# Altium PCB PCB1.PcbDoc (part 3 of 12)
Units mm, origin at the board's own origin, x right, y up, seen from the top; angles counter-clockwise.
Board outline 100 x 100 mm, 6 copper layers (Top Layer, Int1 (GND), Int2 (Sign), Int3 (Sign), Int4 (PWR), Bottom Layer), stack 1.538 mm thick; 614 components, 712 nets, 3014 pads, 1096 vias.
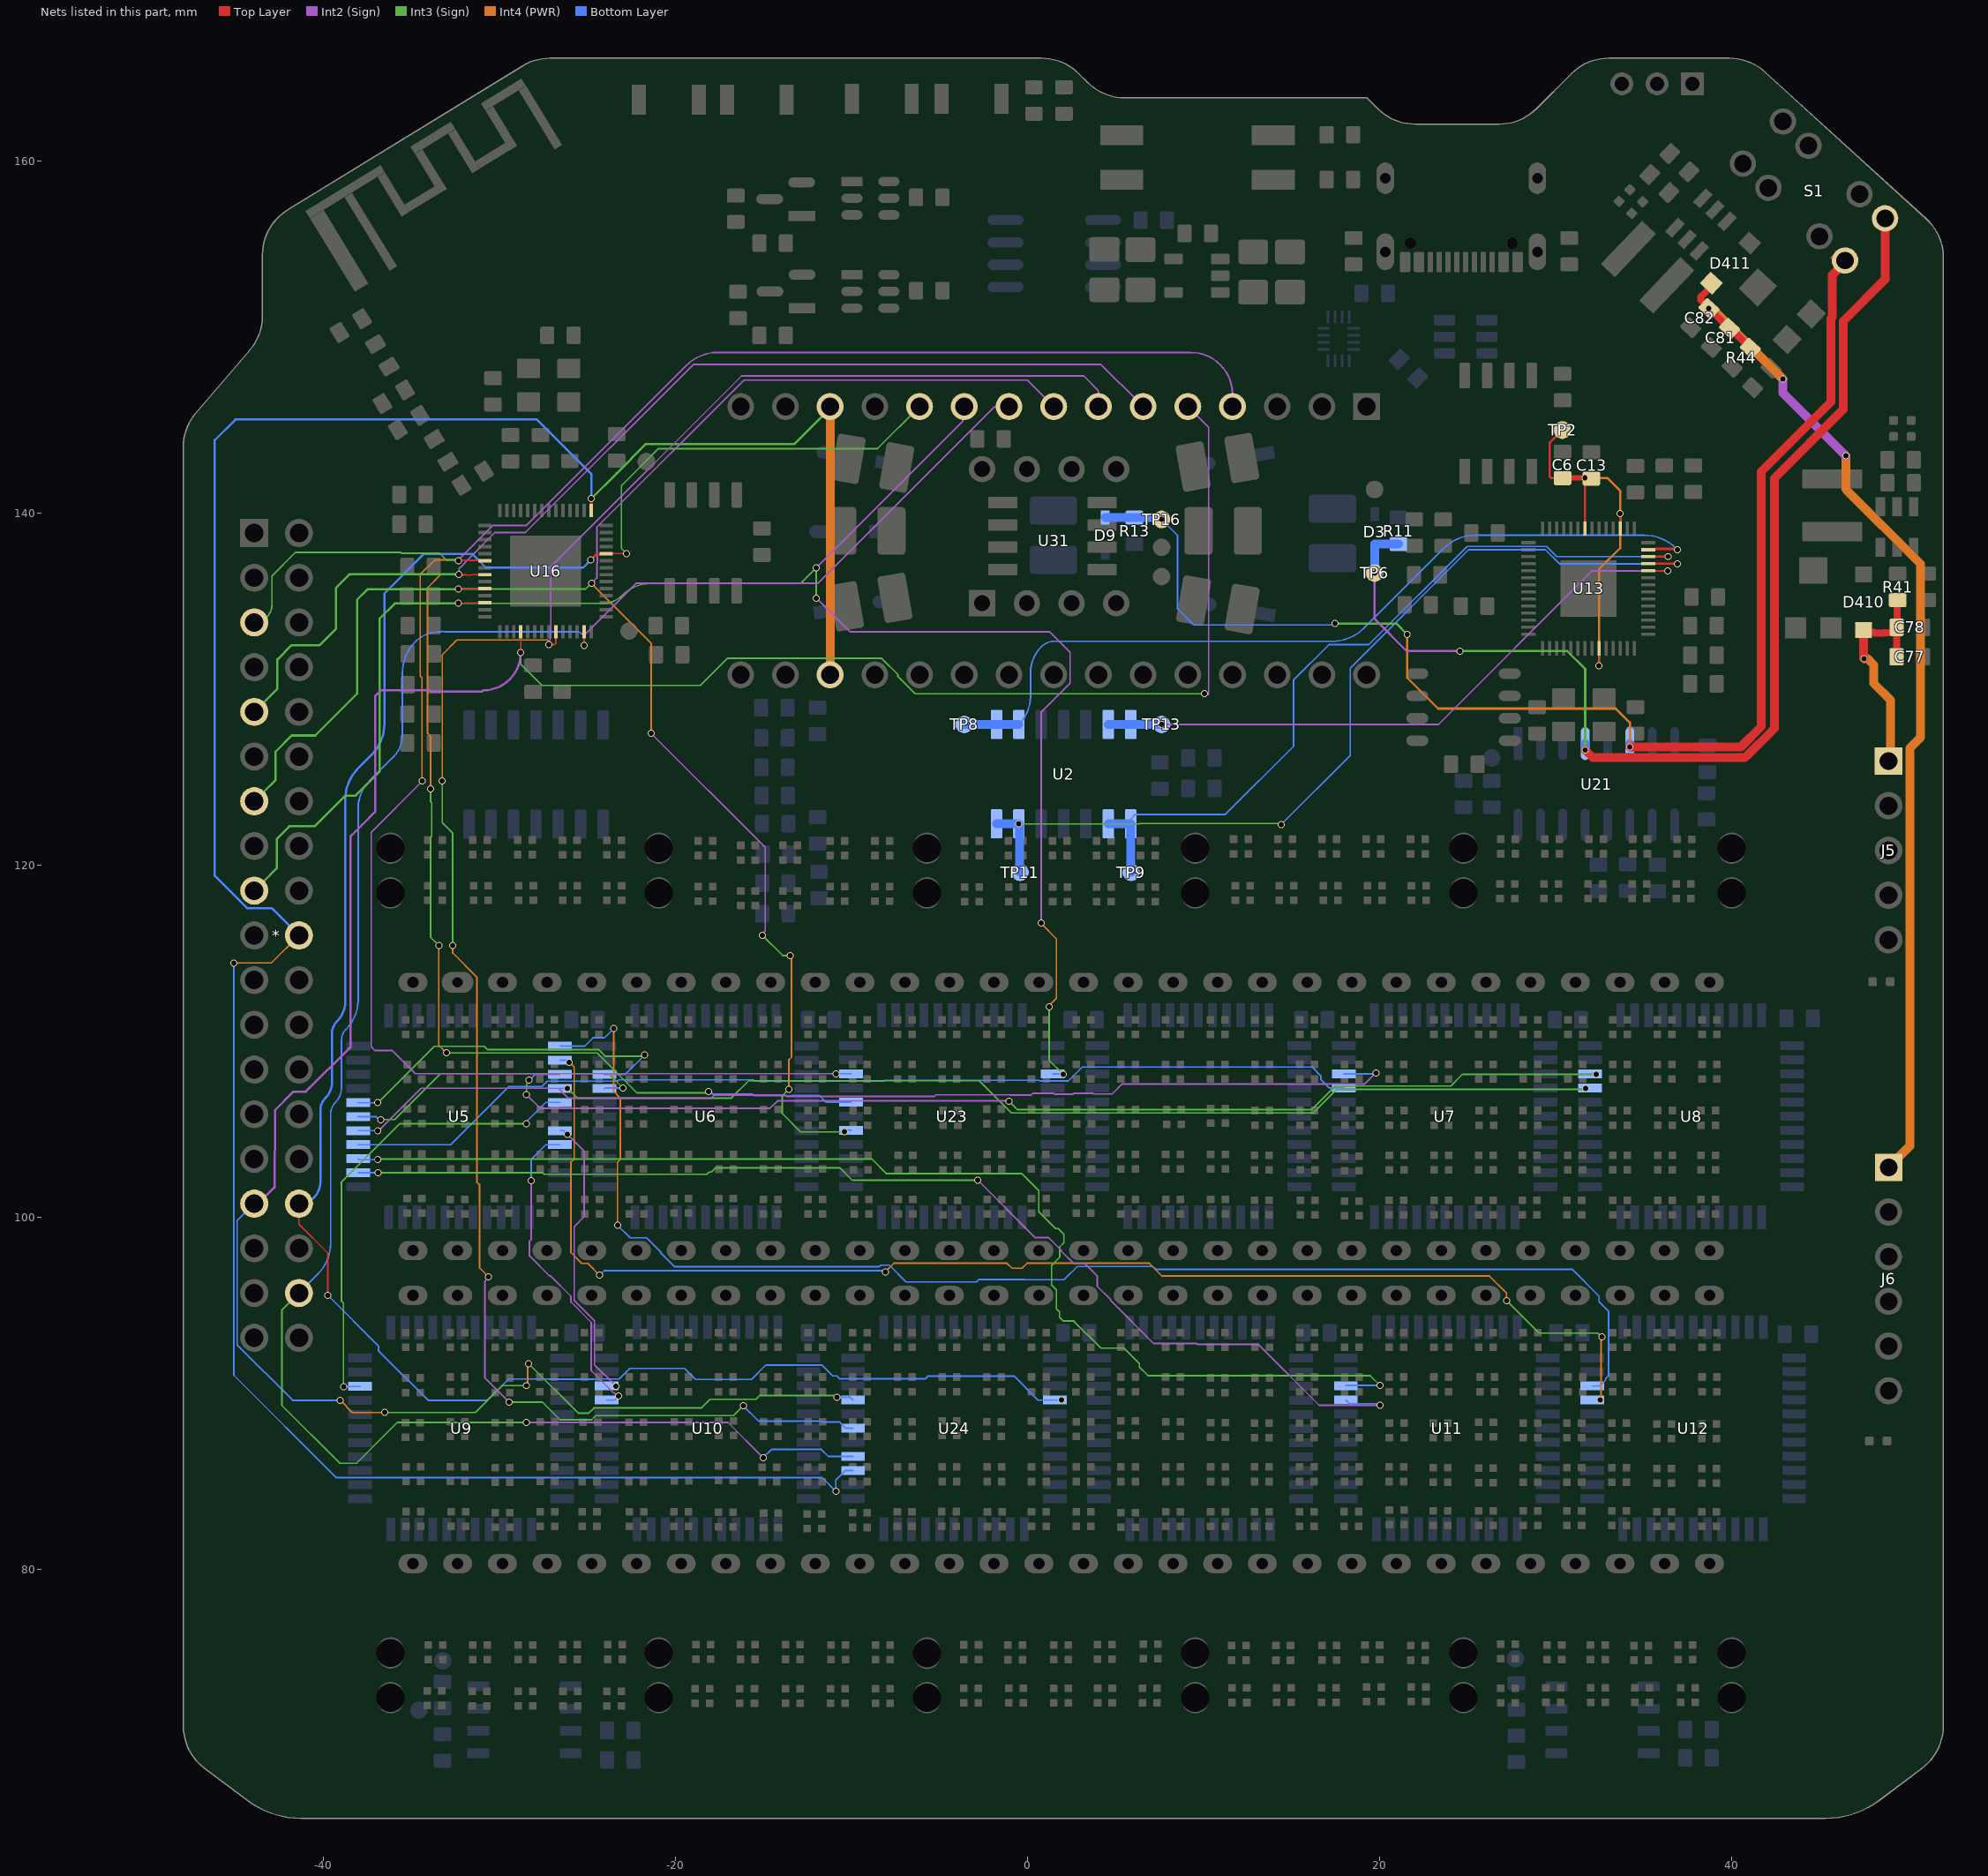
[diagram p6: the nets of this part, all layers, seen from the top]

## Via types
v1: diameter 0.4, hole 0.3, Top Layer to Bottom Layer, tented both sides, 1087 vias
v2: diameter 0.4, hole 0.3, Top Layer to Bottom Layer, 6 vias
v3: diameter 0.4, hole 0.3, Top Layer to Bottom Layer, tented top, 2 vias
v4: diameter 0.6, hole 0.5, Top Layer to Bottom Layer, 1 vias

## Nets (pads, with @x,y where several pads share a name; then routed paths per layer and width w, separated by ;. In a path a pad name is that pad's centre, name@x,y a point inside that pad or via, vN(x,y) a via of type N, cw(c..) or ccw(c..) an arc to the next point about the centre after c; other vN are vias at no path point) (continued)
AC0_3: (continued)
  Int2 (Sign) w0.09: v1(-36.926,104.933) -36.872,104.933 -34.463,107.341 -26.682,107.341 -26.124,106.783 -17.987,106.783 -17.822,106.948 -13.771,106.948 -13.695,106.873 -5.304,106.873 -5.215,106.962 -0.998,106.962 -0.991,106.955 0.185,106.955 0.286,107.055 1.462,107.055 1.508,107.009 2.579,107.009 2.617,107.047 3.688,107.047 3.726,107.009 4.796,107.009 5.369,107.581 19.15,107.581 v1(19.782,108.213)
  Bottom Layer w0.09: U5.27@-38.048,104.933 v1(-36.926,104.933) ; U7.31@17.952,108.148 19.633,108.148 19.698,108.213 v1(19.782,108.213)
AC1_3: U5.26 U7.30 | length 58.5
  Bottom Layer w0.09: U5.26@-38.048,104.133 -32.792,104.133 -29.503,107.422 -27.619,107.422 -27.303,107.738 -23.313,107.738 -23.233,107.818 -15.602,107.818 -15.523,107.738 -10.788,107.738 -10.773,107.753 -8.165,107.753 -8.124,107.794 0.646,107.794 0.687,107.753 2.304,107.753 3.094,108.543 16.157,108.543 16.65,108.05 16.65,107.84 17.142,107.348 U7.30@17.952,107.348
AD0_3: U5.3 U8.31 | length 65.4
  Int2 (Sign) w0.09: v1(-28.48,106.969) -27.715,106.204 -14.636,106.204 -14.22,106.621 -1.094,106.621 v1(-1.063,106.59)
  Int3 (Sign) w0.09: v1(-28.48,106.969) -28.48,107.562 -28.331,107.71 v1(-28.331,107.794) ; v1(-1.063,106.59) -0.6,106.127 16.141,106.127 17.475,107.461 24.027,107.461 24.701,108.135 v1(32.292,108.135)
  Bottom Layer w0.09: v1(-28.331,107.794) -28.012,108.113 -26.598,108.113 U5.3@-26.578,108.133 ; U8.31@31.952,108.148 32.279,108.148 v1(32.292,108.135)
AD1_3: U5.4 U8.30 | length 60.2
  Int3 (Sign) w0.09: v1(-26.148,107.333) -25.598,106.783 -16.837,106.783 -15.856,107.763 -2.762,107.763 -0.936,105.937 16.219,105.937 17.553,107.271 31.637,107.271 v1(31.685,107.319)
  Bottom Layer w0.09: U5.4@-26.578,107.333 v1(-26.148,107.333)
ADC_BUFF_5V_0_1: TP8.1 U2.1 U2.2 U13.41 | length 56.5
  Top Layer w0.127: U13.41@35.26,137.935 35.286,137.96 35.654,137.96 35.678,137.984 36.869,137.984 v2(36.918,137.935)
  Bottom Layer w0.09: v2(36.918,137.935) 36.84,138.013 ccw(c35.044,136.216) 35.044,138.756 25.424,138.756 ; 0.154,129.599 cw(c-2.097,129.599) U2.2@-0.505,128.008 ccw(c-2.097,129.599) 0.154,129.599 ; 0.154,129.599 0.154,130.945 ; 0.154,130.945 cw(c2.239,130.945) 0.765,132.42 ; 0.154,130.945 cw(c2.239,130.945) 0.765,132.42 ; 0.765,132.42 cw(c1.525,131.66) 1.525,132.735 ; 0.765,132.42 cw(c1.525,131.66) 1.525,132.735 ; 1.525,132.735 17.299,132.735 ; 17.299,132.735 ccw(c17.299,135.275) 19.095,133.479 ; 17.299,132.735 ccw(c17.299,135.275) 19.095,133.479 ; 19.095,133.479 23.628,138.013 ; 23.628,138.013 cw(c25.424,136.216) 25.424,138.756 ; 23.628,138.013 cw(c25.424,136.216) 25.424,138.756
  Bottom Layer w0.5: TP8.1@-3.609,128.008 U2.1@-1.775,128.008 U2.2@-0.505,128.008
ADC_BUFF_5V_1_1: TP9.1 U2.8 U2.9 U13.40 | length 44.8
  Top Layer w0.127: U13.40@35.26,137.535 35.266,137.54 36.387,137.54 v2(36.392,137.545)
  Bottom Layer w0.09: U2.8@5.845,122.358 5.845,122.618 6.124,122.898 11.224,122.898 15.105,126.779 15.105,130.542 17.108,132.545 19.379,132.545 24.959,138.125 29.48,138.125 30.059,137.545 v2(36.392,137.545)
  Bottom Layer w0.5: U2.9@4.575,122.358 U2.8@5.845,122.358 5.858,122.344 5.858,119.622 TP9.1@5.872,119.608
ADC_BUFF_5V_2_1: TP11.1 U2.13 U2.14 U13.39 | length 53
  Top Layer w0.09: v1@14.321,122.358 cw(c14.321,122.246) v1(14.4,122.325)
  Top Layer w0.127: U13.39@35.26,137.135 v2(36.918,137.135)
  Int3 (Sign) w0.09: v1(-0.505,122.358) 6.341,122.358 6.363,122.38 14.345,122.38 v1(14.4,122.325)
  Bottom Layer w0.09: v1(14.4,122.325) 18.317,126.242 18.317,131.214 25.038,137.935 29.401,137.935 30.201,137.135 v2(36.918,137.135)
  Bottom Layer w0.5: U2.14@-1.775,122.358 v1(-0.505,122.358) -0.475,122.328 -0.475,119.638 TP11.1@-0.445,119.608
ADC_BUFF_+-8V_1: TP13.1 U2.6 U2.7 U13.38 | length 36.5
  Top Layer w0.09: U13.38@35.26,136.735 v1(36.36,136.735)
  Int2 (Sign) w0.09: v1(7.605,128.008) 23.33,128.008 32.057,136.735 v1(36.36,136.735)
  Bottom Layer w0.5: U2.6@4.575,128.008 U2.7@5.845,128.008 v1(7.605,128.008)
AE0_3: U5.5 U9.31 | length 27
  Int3 (Sign) w0.09: v1(-38.877,90.39) -38.877,95.129 -38.998,95.25 -38.998,102.004 -35.677,105.326 v1(-28.482,105.326)
  Bottom Layer w0.09: v1(-38.877,90.39) -37.948,90.39 U9.31@-37.93,90.408 ; v1(-28.482,105.326) -28.422,105.385 -28.422,105.499 -27.388,106.533 U5.5@-26.578,106.533
AF0_3: U5.7 U10.31 | length 16.4
  Int2 (Sign) w0.09: v1(-26.148,104.71) -25.21,103.772 -25.21,100.034 -25.769,99.475 -25.769,95.277 -24.614,94.121 -24.614,91.629 v1(-23.398,90.414)
  Bottom Layer w0.09: U5.7@-26.578,104.933 -26.371,104.933 v1(-26.148,104.71)
AF1_3: U5.8 U10.30 | length 18.4
  Int2 (Sign) w0.09: v1(-28.212,102.078) -28.212,98.752 -28.309,98.655 -28.309,97.817 -27.16,96.668 -27.108,96.668 -25.959,95.519 -25.959,95.198 -24.804,94.043 -24.804,91.294 -23.552,90.042 -23.523,90.042 -23.327,89.846 v1(-23.245,89.846)
  Bottom Layer w0.09: v1(-28.212,102.078) -28.212,103.309 -27.388,104.133 U5.8@-26.578,104.133 ; U10.30@-23.93,89.623 -23.468,89.623 v1(-23.245,89.846)
AG0_3: U5.25 U11.31 | length 69.7
  Int3 (Sign) w0.09: v1(-36.926,103.282) -36.891,103.317 -8.859,103.317 -8.026,102.485 -0.333,102.485 0.625,101.526 0.625,100.326 1.583,99.367 1.724,99.367 2.058,99.034 2.058,98.571 1.815,98.328 1.815,97.738 1.347,97.27 1.347,96.153 1.625,95.875 1.625,94.815 1.804,94.636 1.804,94.339 2.033,94.11 2.613,94.11 4.151,92.572 5.47,92.572 6.341,91.7 6.341,91.5 6.834,91.008 19.46,91.008 v1(20.012,90.456)
  Bottom Layer w0.09: U5.25@-38.048,103.333 -37.997,103.282 v1(-36.926,103.282) ; U11.31@18.07,90.423 18.103,90.456 v1(20.012,90.456)
AG1_3: U5.24 U11.30 | length 66.3
  Int2 (Sign) w0.09: v1(-2.841,102.113) 0.42,98.851 1.189,98.851 1.892,98.147 1.892,98.095 2.596,97.392 3.238,97.392 3.941,96.688 3.941,96.098 4.711,95.329 4.711,95.277 7.153,92.834 9.597,92.834 9.636,92.795 13.087,92.795 16.554,89.329 v1(20.012,89.329)
  Int3 (Sign) w0.09: v1(-36.901,102.533) -27.556,102.533 -27.48,102.457 -18.218,102.457 -18.102,102.573 -17.972,102.573 -17.725,102.82 -10.679,102.82 -9.971,102.113 v1(-2.841,102.113)
  Bottom Layer w0.09: U5.24@-38.048,102.533 v1(-36.901,102.533) ; U11.30@18.07,89.623 18.275,89.418 19.839,89.418 19.928,89.329 v1(20.012,89.329)
AH0_3: U5.1 U12.31 | length 79.1
  Int4 (PWR) w0.09: v1(-23.52,110.738) -23.52,107.157 -23.154,106.791 -23.154,103.295 -23.31,103.139 v1(-23.31,99.559)
  Bottom Layer w0.09: U5.1@-26.578,109.733 -25.178,109.733 -24.705,110.206 -24.052,110.206 v1(-23.52,110.738) ; v1(-23.31,99.559) -22.589,98.838 -21.658,98.838 -20.867,98.047 -20.867,97.995 -20.076,97.204 -8.423,97.204 -8.344,97.283 -7.862,97.283 -6.917,96.338 -2.913,96.338 -2.776,96.475 -0.194,96.475 -0.179,96.46 2.063,96.46 2.817,97.214 7.097,97.214 7.257,97.053 30.926,97.053 32.461,95.519 32.461,95.198 33.002,94.657 33.002,91.025 32.832,90.855 32.832,90.76 32.495,90.423 U12.31@32.07,90.423
AH1_3: U5.2 U12.30 | length 76.9
  Int3 (Sign) w0.09: v1(27.199,95.277) 29.044,93.431 32.382,93.431 32.608,93.205 v1(32.63,93.205)
  Int4 (PWR) w0.09: v1(-26.051,108.816) -25.776,108.542 -25.776,103.318 -25.954,103.14 -25.954,98.001 -25.339,97.387 -25.004,97.387 v1(-24.33,96.713) ; v1(-8.091,96.911) -7.608,97.394 -1.176,97.394 -0.894,97.111 -0.322,97.111 -0.04,97.394 6.902,97.394 7.622,96.673 26.226,96.673 27.199,95.701 v1(27.199,95.277) ; v1(32.524,89.641) 32.577,89.694 32.577,93.152 v1(32.63,93.205)
  Bottom Layer w0.09: U5.2@-26.578,108.933 -26.167,108.933 v1(-26.051,108.816) ; v1(-24.33,96.713) -24.069,96.974 -8.238,96.974 -8.174,96.911 v1(-8.091,96.911)